# EAGLE board Ex 7 Segment Display Common Cathode (EAGLE 7.6.0)
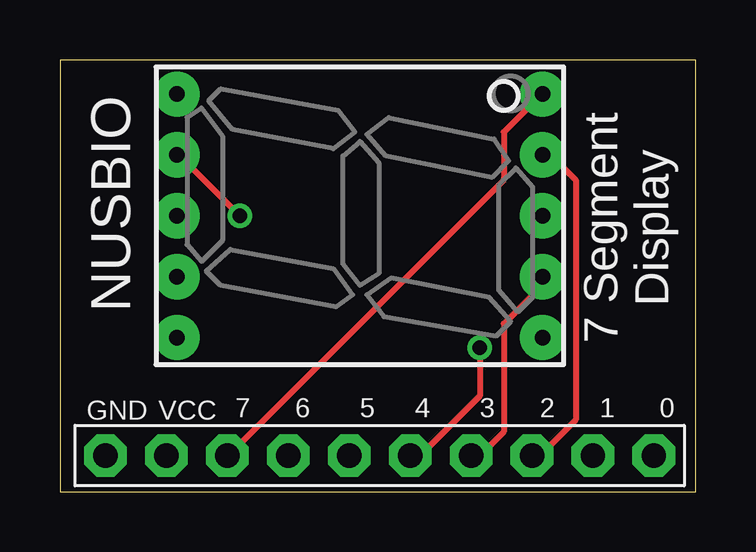
[diagram p0: board, top side]
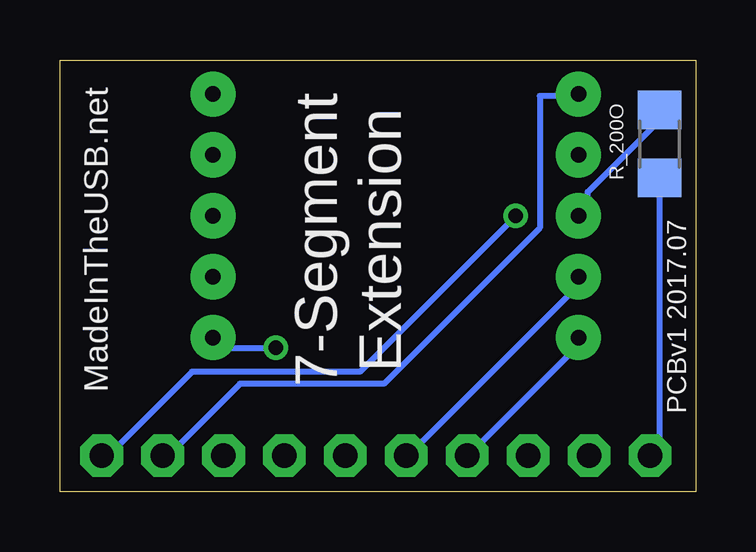
[diagram p1: board, bottom side, seen from below]

Size 26.5 x 18 mm. Coordinates in mm from the lower left corner, seen from the top.
Outline: 0,0 26.5,0 26.5,18 0,18 0,0
Copper layers (1*16): Top 0.035mm / dielectric 1.5mm / Bottom 0.035mm
Design rules "default": minimum track width 10mil, minimum drill 24mil, track to track 8mil, track to pad 8mil, pad to pad 8mil, via to via 8mil, smd to smd 8mil, copper to edge 40mil, drill to drill 8mil, minimum pad ring 10mil, minimum via ring 8mil, stop-mask expansion 4mil, vias tented up to drill 0mil, thermal gap 10mil

## Footprints (pad centres in the part's own frame; a part is rotated, then mirrored left to right if it is on the bottom)
1X10-BIG = drill 1.016 pad 1.778 octagon: 1 -11.43,0; 2 -8.89,0; 3 -6.35,0; 4 -3.81,0; 5 -1.27,0; 6 1.27,0; 7 3.81,0; 8 6.35,0; 9 8.89,0; 10 11.43,0
R1206 = smd 1.6 x 1.803: 1 -1.422,0; 2 1.422,0
7-SEGMENT-DISPLAY = drill 0.65 pad 1.88: 1 -5.08,-7.62; 2 -2.54,-7.62; 3 0,-7.62; 4 2.54,-7.62; 5 5.08,-7.62; 6 5.08,7.62; 7 2.54,7.62; 8 0,7.62; 9 -2.54,7.62; 10 -5.08,7.62

## Placement (x,y rotation side)
NUSBIO_IN  PINHD-1X10  [1X10-BIG]  13.33,1.5 180 top
R_200O  [R1206]  1.5,14.5 90 bottom
U$1  7-SEGMENT-DISPLAYPTH  [7-SEGMENT-DISPLAY]  12.5,11.5 90 top

## Library data of the parts
NUSBIO_IN R_200O = adafruit
U$1 = SparkFun-Displays

## Nets
GND: NUSBIO_IN.10 R_200O.1
GPIO_A: NUSBIO_IN.1 U$1.7
GPIO_B: NUSBIO_IN.2 U$1.6
GPIO_C: NUSBIO_IN.3 U$1.4
GPIO_D: NUSBIO_IN.4 U$1.2
GPIO_DP: NUSBIO_IN.8 U$1.5
GPIO_E: NUSBIO_IN.5 U$1.1
GPIO_F: NUSBIO_IN.6 U$1.9
GPIO_G: NUSBIO_IN.7 U$1.10
N$1: R_200O.2 U$1.8
VCC: NUSBIO_IN.9

## Tracks (layer width: path | path; a pad name or v marks a point on that pad's centre or on a via)
GND
  Bottom 0.254: R_200O.1 1.5,1.5 NUSBIO_IN.10
GPIO_A  (via drill 0.61)
  Top 0.254: v7.5,11.5 5,14 U$1.7
  Bottom 0.254: v7.5,11.5 14,5 21,5 24.5,1.5 NUSBIO_IN.1
GPIO_B
  Bottom 0.254: NUSBIO_IN.2 22,1.5 19,4.5 13,4.5 6.5,11 6.5,16.5 5,16.5 U$1.6
GPIO_C
  Top 0.254: NUSBIO_IN.3 20,1.5 21.5,3 21.5,13 20.5,14 U$1.4
GPIO_D
  Top 0.254: NUSBIO_IN.4 17.5,1.5 18.5,2.5 18.5,7 20,8.5 U$1.2
GPIO_DP
  Top 0.254: NUSBIO_IN.8 7,1.5 18.5,13 18.5,15 20,16.5 U$1.5
GPIO_E  (via drill 0.61)
  Top 0.254: v17.5,6 17.5,4 15,1.5 NUSBIO_IN.5
  Bottom 0.254: v17.5,6 20,6 U$1.1
GPIO_F
  Bottom 0.254: NUSBIO_IN.6 12,1.5 5,8.5 U$1.9
GPIO_G
  Bottom 0.254: NUSBIO_IN.7 9.5,1.5 5,6 U$1.10
N$1
  Bottom 0.254: R_200O.2 1.5,15.5 4.5,12.5 4.5,11.5 U$1.8

## Text on the board
tNames: NUSBIO | 7 Segment / Display | GND | VCC | 7 | 6 | 5 | 4 | 3 | 2 | 1 | 0
bNames: 7-Segment / Extension | MadeInTheUSB.net | PCBv1 2017.07